# Altium PCB PCB_CL-PFC-01.PcbDoc
Units mil, origin at the board's own origin, x right, y up, seen from the top; angles counter-clockwise.
Board outline 3335 x 1570 mil, 2 copper layers (Top Layer, Bottom Layer); 26 components, 14 nets, 57 pads, 54 vias.
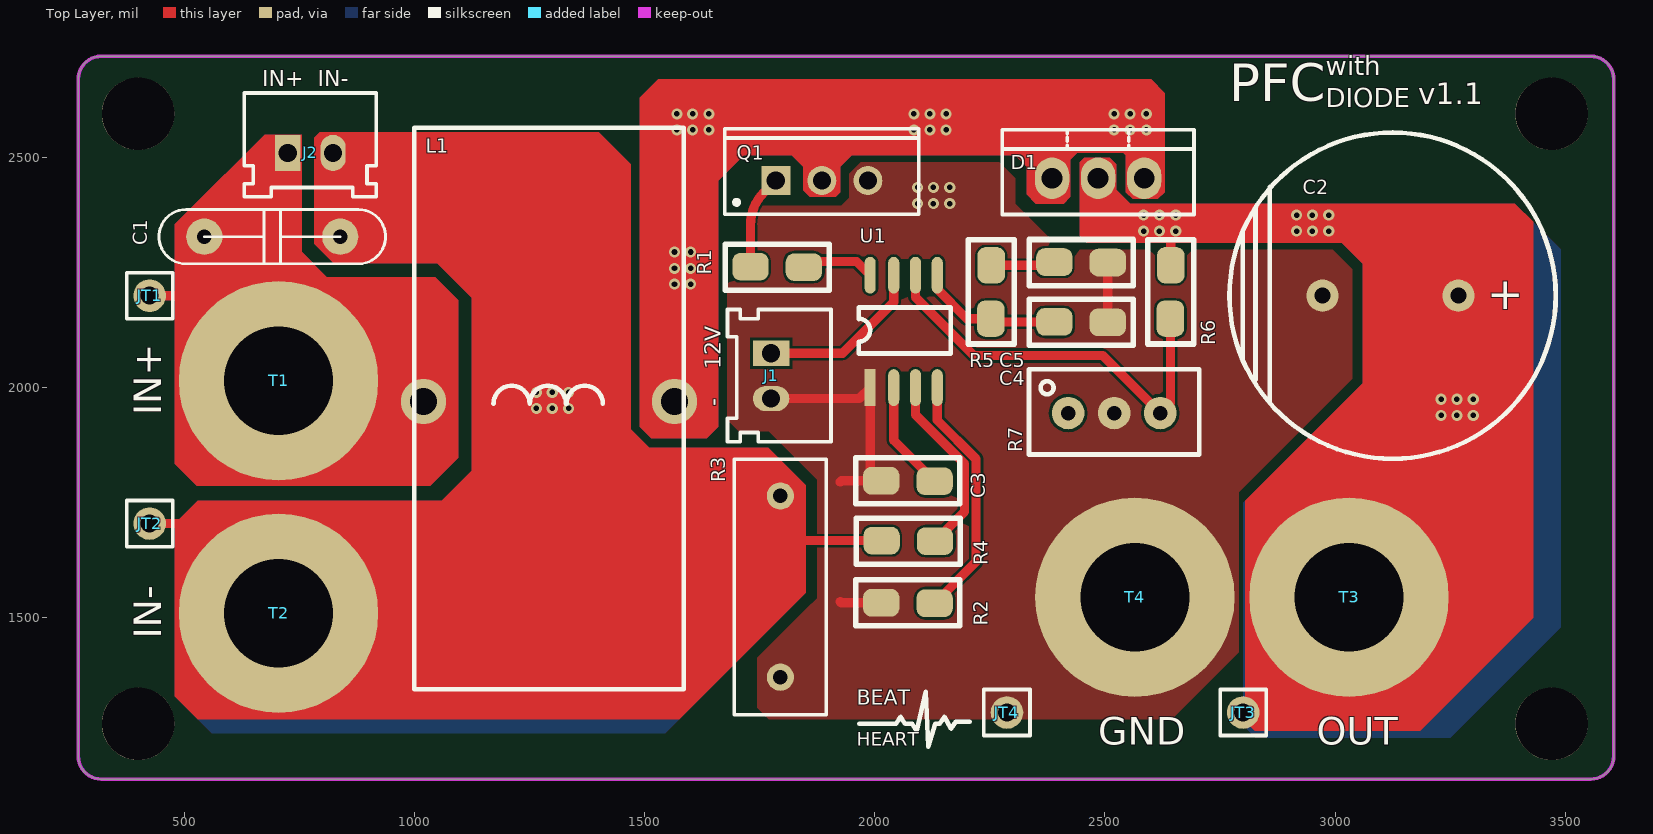
[diagram p0: Top Layer view]
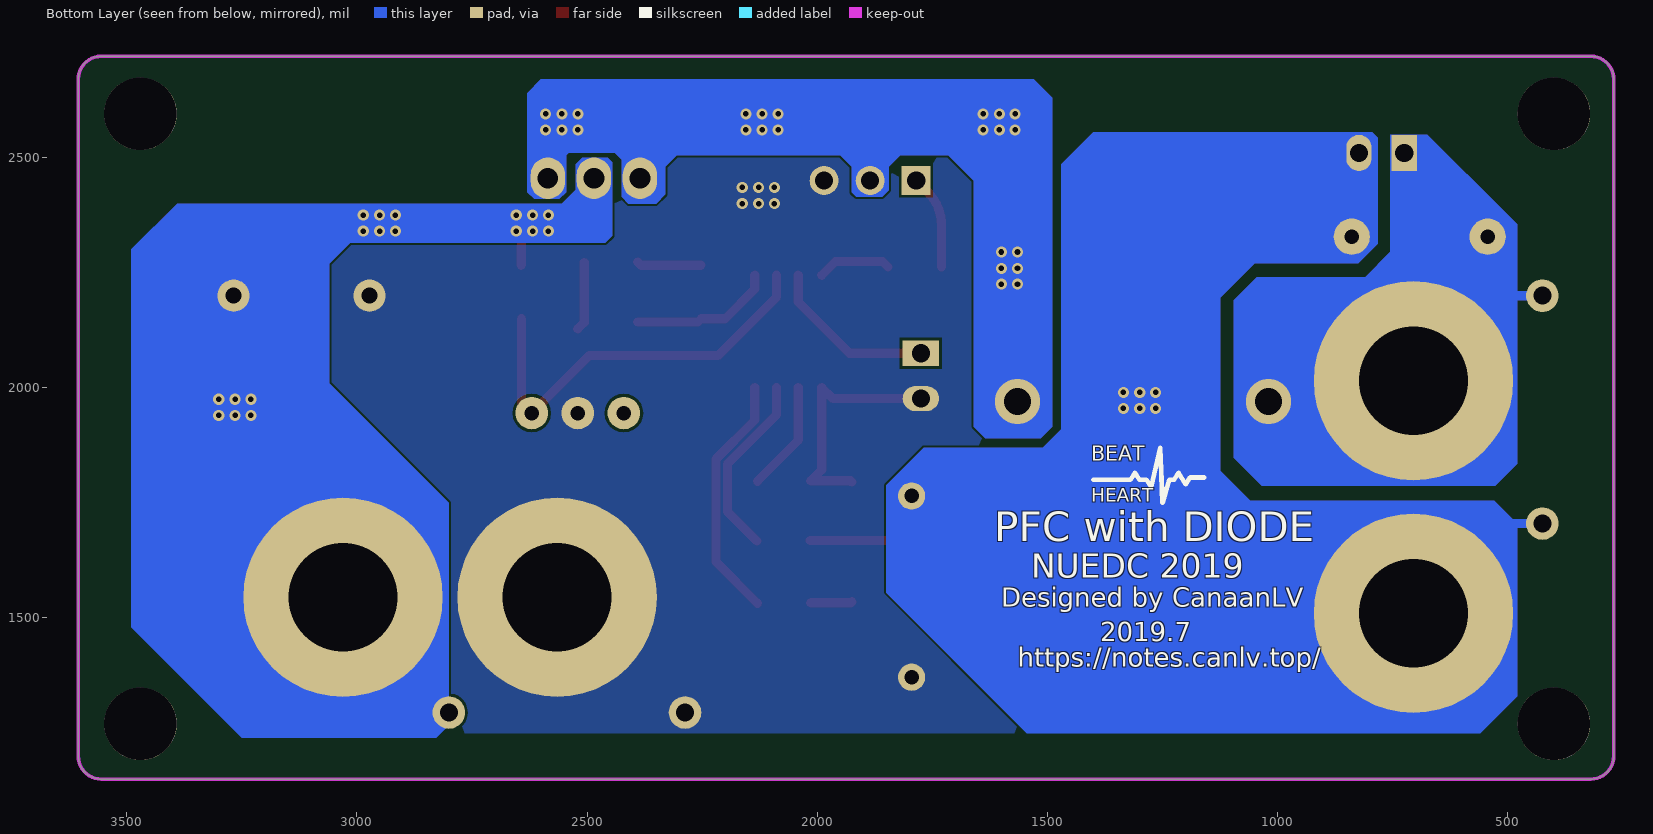
[diagram p1: Bottom Layer view, seen from below]
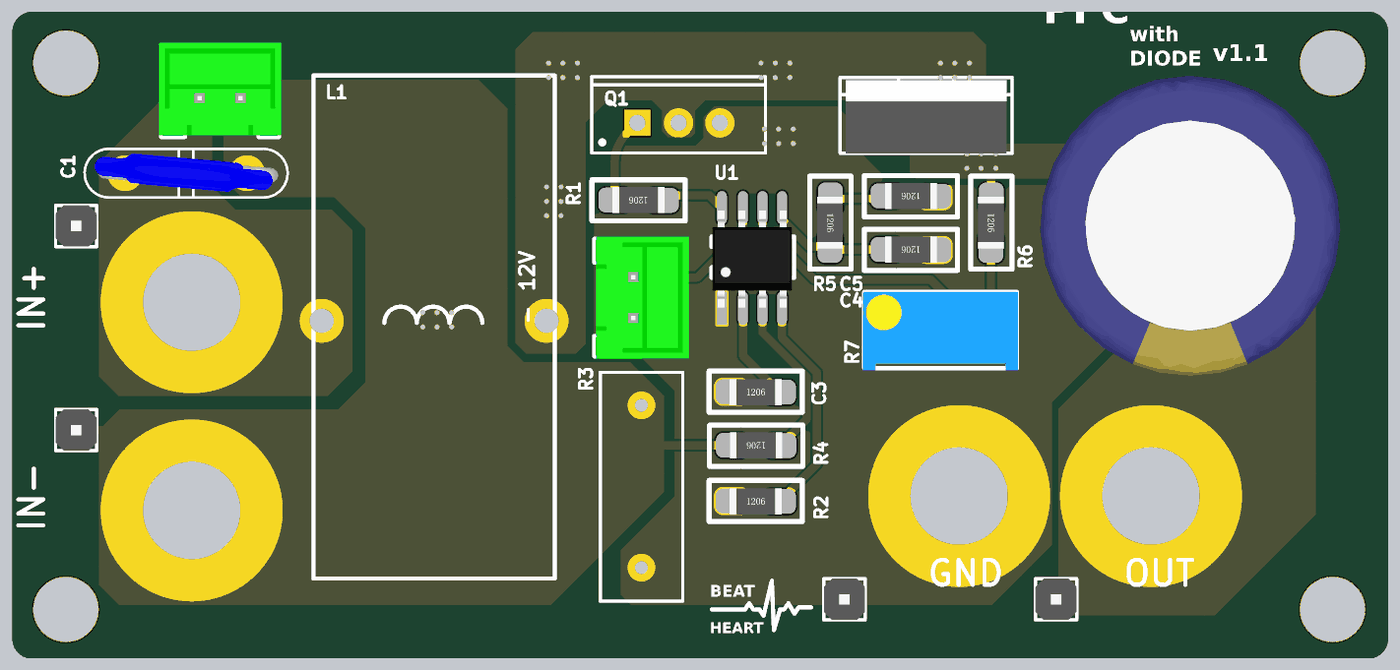
[diagram p2: 3D render of the assembled board from above, using the file's embedded part models]

## Layer stack, top to bottom
Top Solder: solder mask 0.4, Solder Resist, Dk 3.5
Top Layer: signal copper 1.4
Dielectric 1: dielectric 12.6, FR-4, Dk 4.8
Bottom Layer: signal copper 1.4
Bottom Solder: solder mask 0.4, Solder Resist, Dk 3.5

## Board outline
320,1150 cw(c320,1200) 270,1200 270,2670 cw(c320,2670) 320,2720 3555,2720 cw(c3555,2670) 3605,2670 3605,1200 cw(c3555,1200) 3555,1150

## Design rules (kind name [scope] priority, off if disabled: settings)
BoardOutlineClearance [All] p1: gap=7.87
Clearance [All] p1: gap=5 except(0: Arc-Text Track-Text Fill-Text Poly-Text Region-Text Text-Text; 3.5: SMDPad-Text THPad-Text Via-Text; 5.98: Arc-Via Track-Via THPad-Fill THPad-Poly THPad-Region Via-Fill Via-Poly Via-Region; 6: Arc-SMDPad Arc-THPad Track-SMDPad Track-THPad; 10: SMDPad-SMDPad SMDPad-THPad SMDPad-Via THPad-THPad THPad-Via Via-Via)
ComponentClearance [All] p1: gap=10 collisioncheckmode=3 verticalgap=10 showdistances=TRUE
DiffPairsRouting [All] p1: maxlimit=10 minlimit=6 mostfreqgap=10 toplayer_minwidth=5.98 toplayer_maxwidth=15 toplayer_prefwidth=15 bottomlayer_minwidth=5.98 bottomlayer_maxwidth=15 bottomlayer_prefwidth=15 maxuncoupledlength=500
Height [All] p1: minheight=0 maxheight=39370.08 prefheight=500
HoleSize [All] p1: absolutevalues=TRUE maxlimit=23.62 minlimit=11.81 maxpercent=80.000 minpercent=20.000
MinimumSolderMaskSliver [All] p1: minsoldermaskwidth=1.97
PlaneConnect [All] p1: planeconnectstyle=Direct reliefexpansion=20 reliefentries=4 reliefconductorwidth=10 reliefairgap=10
PolygonConnect [All] p1: connectstyle=Direct reliefconductorwidth=10 reliefentries=4 polygonreliefangle="90 Angle" airgapwidth=10
RoomDefinition Sheet_CL-PFC-01 [InComponentClass('Sheet1')] p1: confinementstyle=ConfineIn formatcopy=TRUE lockcomponents=FALSE outline 130,995 3650,995 3650,2770 130,2770
RoutingVias [All] p1: holewidth=15.75 width=27.56 viastyle="Through Hole" minholewidth=11.81 minwidth=23.62 maxholewidth=248.03 maxwidth=275.59
SilkToSilkClearance [All] p1: silktosilkclearance=5
SilkToSolderMaskClearance [IsPad] p1: minsilkscreentomaskgap=3.5 clearancetoexposedcopper=FALSE
SolderMaskExpansion [All] p1: expansion=4
Width [All] p1: maxlimit=80 minlimit=5 preferedwidth=10
22 further rules are at their usual default settings.

## Components (designator, comment, footprint, x,y, rotation, side; value= is the part's Value field where it differs from the comment)
C1 "uF" CAP-7.5-CP 465,2210 r0 top
C2 "uF" CZ18X35 3120,2200 r0 top
C3 "uF" C120603 2080,1795 r0 top
C4 "uF" C120603 2440,2145 r180 top
C5 "uF" C120603 2440,2275 r180 top
D1 "TO-220" TO-220 2485,2455 r0 top
J1 "SIP-2" 2.54XH接插件2P 1775,2075 r270 top
J2 "SIP-2" 2.54XH接插件2P 725,2510 r0 top
JT1 "SIP-1" 2.54排针1X1 425,2200 r0 top
JT2 "SIP-1" 2.54排针1X1 425,1705 r0 top
JT3 "SIP-1" 2.54排针1X1 2800,1294.58 r0 top
JT4 "SIP-1" 2.54排针1X1 2287.04,1294.58 r0 top
L1 "直插电感" 77930 1000,2565 r270 top
Q1 "IRF540N" TO-220AB 1885,2450 r0 top
R1 "R贴片电阻" R120603 1780,2265 r180 top
R2 "R贴片电阻" R120603 2080,1530 r0 top
R3 "R直插电阻" 水泥电阻 1795,1765 r270 top
R4 "R贴片电阻" R120603 2065,1670 r180 top
R5 "R贴片电阻" R120603 2250,2200 r270 top
R6 "R贴片电阻" R120603 2640,2200 r270 top
R7 "主控" ADJ-3296-1 2520,1945 r180 top
T1 "香蕉头接线柱" 香蕉接线柱Black_6mm 705,2015 r90 top
T2 "香蕉头接线柱" 香蕉接线柱Black_6mm 705,1510 r90 top
T3 "香蕉头接线柱" 香蕉接线柱Black_6mm 3030,1545 r180 top
T4 "香蕉头接线柱" 香蕉接线柱Black_6mm 2565,1545 r180 top
U1 "ICE1PC" SOP8 2065,2125 r90 top

## Footprints (in the part's own frame and the unit in brackets; to place one, negate y for a bottom-side part, rotate by r counter-clockwise, add the part's x,y. Pads: shape width x height; smd on the part's side, far side on the other; paste and mask are expansions set on the pad)
2.54XH接插件2P [mm]
  rect 1.4x2 hole 1: 1(0,0)
  oval 1.4x2 hole 1: 2(2.5,0)
  silkscreen extent -2.41,-2.41 4.88,3.3, body extent -2.51,-2.3 4.99,3.4, height 7
2.54排针1X1 [mm]
  round 1.8 hole 1: 1(0,0)
  silkscreen extent -1.27,-1.27 1.27,1.27, body extent -1.27,-1.27 1.27,1.27, height 2.5
77930 [mm]
  round 2.5 hole 1.5: 1(15.113,0.508) 2(15.113,14.351)
  silkscreen extent 0,0 30.99,14.86
ADJ-3296-1 [mm]
  round 1.8 hole 0.8: 1(-2.54,0) 2(0,0) 3(2.54,0)
  silkscreen extent -4.7,-2.41 4.7,2.29, body extent -4.76,-2.42 4.76,2.41, height 11.55
C120603 [mil] "兼容"
  rrect60% 78.74x60 smd: 1(-66,3) 2(50,2)
  silkscreen extent -121,-47 105,53, body extent -71,-29 55,33, height 24
CAP-7.5-CP [mm]
  round 2 hole 0.8: 1(2,3) 2(9.5,3)
  silkscreen extent -0.5,1.5 12,4.5, body extent 0.05,1.59 11.45,4.41, height 16.5
CZ18X35 [mil]
  round 70 hole 35: 1(147.64,0) 2(-147.64,0)
  silkscreen extent -350,-354 359,354, body extent -358,-360 368,365, height 1476
R120603 [mil] "兼容"
  rrect60% 78.74x60 smd: 1(-66,3) 2(50,2)
  silkscreen extent -121,-47 105,53, body extent -71,-29 55,33, height 24
SOP8 [mil]
  rect 80x24 smd: 1(-124.69,75)
  oval 80x24 smd: 2(-124.69,23.82) 3(-124.69,-23.43) 4(-124.69,-70.67) 5(119.41,-70.67) 6(119.41,-23.43) 7(119.41,23.82) 8(119.41,75)
  silkscreen extent -51,-100 49,100, body extent -123,-95 113,98, height 63
TO-220 [mil]
  oval 75x90 hole 45: A(-100,0) A(100,0) K(0,0)
  silkscreen extent -208,-79 208,105, body extent -195,-79 195,98, height 720
TO-220AB [mm] "TO, Thru-Hole, Vertical, Heatsink Mounted; 3 In-Line Leads; Pitch 2.54 mm"
  rect 1.6x1.6 hole 1: 1(-2.54,0)
  round 1.6 hole 1: 2(0,0) 3(2.54,0)
  silkscreen extent -5.35,-1.85 5.35,2.85, body extent -5.4,-1.9 5.4,2.9, height 19.3
水泥电阻 [mm]
  round 1.5 hole 0.8: 1(0,0) 2(10,0)
  silkscreen extent -2.03,-2.54 12.06,2.54
香蕉接线柱Black_6mm [mm]
  round 11 hole 6: 1(0,0)
  body extent -5.5,-5.5 5.5,13.5, height 9

## Part data
C1: library part C直插无极性
C2: library part C直插电容
C3 C4 C5: library part C贴片电容
Q1: "HEXFET Power MOSFET"
R7: library part R电位器
U1: library part IC8

## Free pads (board coordinates)
  round 157.48 hole 157.48: 2(400,2595) 3(400,1270) 4(3470,1270) 5(3470,2595)

## Via types
v1: diameter 24, hole 12, Top Layer to Bottom Layer, tented both sides, 54 vias

## Nets (pads, with @x,y where several pads share a name; then routed paths per layer and width w, separated by ;. In a path a pad name is that pad's centre, name@x,y a point inside that pad or via, vN(x,y) a via of type N, cw(c..) or ccw(c..) an arc to the next point about the centre after c; other vN are vias at no path point)
FGEQ: R2.2 U1.4 | length 540.5
  Top Layer w20: R2.2 2220,1622.01 2220,1845.36 2135.67,1929.69 U1.4
GATE: R1.1 U1.8 | length 161.6
  Top Layer w20: R1.1 1858.41,2274.41 1960,2274.41 U1.8
GND: C2.2 C3.1 C4.1 C5.1 J1.2 JT4.1 Q1.3 R2.1 R3.2 R7.2 T4.1 U1.1 | length 767
  Top Layer w20: J1.2 1966.26,1976.57 U1.1 1990,1822 C3.1 1928,1798 1925,1795 ; 1925,1535 1927,1533 R2.1 ; C5.1 C4.1 C4.1@2520,2128
  other v1: 2093.05,2400 2127.5,2400 2162.87,2400 2093.05,2435 2127.5,2435 2162.87,2435
ICOMP: C3.2 U1.2 | length 240.1
  Top Layer w20: U1.2 2041.18,1885.82 C3.2
IN+: C1.1 J2.1 JT1.1 L1.1 T1.1 | length 208.3
  Top Layer w20: JT1.1 500,2200 510,2190
  Bottom Layer w20: JT1.1 530,2200 540,2190
IN-: C1.2 J2.2 JT2.1 R3.1 R4.2 T2.1 | length 550.7
  Top Layer w20: JT2.1 535,1705 550,1690 ; R3.1 1795,1705 1832,1668 R4.2
  Bottom Layer w20: JT2.1 535,1705 545,1695
  other v1: 1265,1955 1299.45,1955 1334.82,1955 1265,1990 1299.45,1990 1334.82,1990
ISENSE: R4.1 U1.3 | length 404
  Top Layer w20: U1.3 2088.43,1941.57 2195,1835 2195,1731 R4.1
NetC5_2: C5.2 R5.1 | length 139.9
  Top Layer w20: R5.1 2383.01,2266 C5.2
NetD1_A: D1.A L1.2 Q1.2
  other v1: 1565,2225 1600,2225 1565,2259.45 1600,2259.45 1565,2294.82 1600,2294.82 1570,2560 1604.45,2560 1639.82,2560 2085,2560 2119.45,2560 2154.82,2560 2520,2560 2554.45,2560 2589.82,2560 1570,2595 1604.45,2595 1639.82,2595 2085,2595 2119.45,2595 2154.82,2595 2520,2595 2554.45,2595 2589.82,2595
PWM: Q1.1 R1.2 | length 205.5
  Top Layer w20: R1.2 1730,2353.58 cw(c1830,2353.58) 1759.29,2424.29 Q1.1
VCC_12V: J1.1 U1.7 | length 370.5
  Top Layer w20: J1.1 1930,2075 2041.18,2186.18 U1.7
VCOMP: C4.2 R5.2 U1.5 | length 314
  Top Layer w20: U1.5 2135.67,2214.33 2200,2150 R5.2 2259.01,2143 C4.2
VOUT: C2.1 D1.K JT3.1 R6.1 T3.1 | length 74.8
  Top Layer w20: R6.1 2643,2338 v1@2645,2340
  other v1: 3230,1940 3264.45,1940 3299.82,1940 3230,1975 3264.45,1975 3299.82,1975 2583.82,2340 2618.27,2340 2653.65,2340 2916.17,2340 2950.63,2340 2986,2340 2583.82,2375 2618.27,2375 2653.65,2375 2916.17,2375 2950.63,2375 2986,2375
VSENSE: R6.2 R7.1 U1.6 | length 897.7
  Top Layer w20: U1.6 2088.43,2196.57 2215,2070 2495,2070 R7.1 2642,1967 R6.2
pads on no net: R7.3

## Polygon pours and split planes (outlines as drawn)
GND on Top Layer "GND_L01_P000" (solid, remove dead copper, pour order 0): 1770,1280 2645,1280 2790,1425 2790,1772.8 3037.2,2020 3037.2,2257.8 2995,2300 2405,2300 2305,2400 2305,2455 2270,2490 1970,2490 1945,2465 1945,2413 1927,2395 1705,2395 1680,2370 1680,1930 1705,1905 1770,1905 1875,1800 1875,1543.3 1851.7,1520 1745,1413.3 1745,1305
GND on Bottom Layer "GND_L02_P002" (solid, remove dead copper, pour order 2): 620,2660 415,2455 415,2255 415,1410 575,1250 3287.64,1250 3490,1452.36 3490,1635 3490,2420 3250,2660

## Keep-outs
Keep-Out Layer:
  lines w7.87: 270,1200 ccw(c320,1200) 320,1150 3555,1150 ccw(c3555,1200) 3605,1200 3605,2670 ccw(c3555,2670) 3555,2720 700,2720 320,2720 ccw(c320,2670) 270,2670 270,1200

## Other copper
Top Layer:
  region net NetD1_A: 1490,1915 1515,1890 1635,1890 1660,1915 1660,2450 1715,2505 1820,2505 1845,2480 1845,2428.41 1858.41,2415 1915.71,2415 1925,2424.29 1925,2480 1950,2505 2305,2505 2330,2480 2330,2420 2350,2400 2410,2400 2425,2415 2425,2495 2440,2510 2540,2510 2545,2505 2545,2425 2560,2410 2615,2410 2630,2425 2630,2640 2600,2670 1530,2670 1490,2630
  region net IN-: 795,2555 782.5,2542.5 782.5,2312.5 825,2270 1050,2270 1125,2195 1125,1820 1060,1755 530,1755 480,1705 480,1330 530,1280 1575,1280 1850,1555 1850,1788.41 1768.41,1870 1510,1870 1470,1910 1470,2485 1400,2555
  region net IN+: 480,2210 480,2355 505,2380 675,2550 755,2550 755,2295 810,2240
  region net IN+: 1045,2240 1095,2190 1095,1848 1034.5,1787.5 527.5,1787.5 480,1835 480,2210 510,2240
  region net VOUT: 2445,2490 2445,2330 2460,2315 3014.41,2315 3060,2269.41 3060,2010 2805,1755 2805,1275 2825,1255 3185,1255 3430,1500 3430,2360 3390,2400 2635,2400 2555,2400 2525,2430 2525,2485 2510,2500 2455,2500
Bottom Layer:
  region net NetD1_A: 1490,1915 1515,1890 1635,1890 1660,1915 1660,2450 1715,2505 1820,2505 1845,2480 1845,2428.41 1858.41,2415 1915.71,2415 1925,2424.29 1925,2480 1950,2505 2305,2505 2330,2480 2330,2420 2350,2400 2410,2400 2425,2415 2425,2495 2440,2510 2540,2510 2545,2505 2545,2425 2560,2410 2615,2410 2630,2425 2630,2640 2600,2670 1530,2670 1490,2630
  region net IN-: 795,2555 782.5,2542.5 782.5,2312.5 825,2270 1050,2270 1125,2195 1125,1820 1060,1755 530,1755 480,1705 480,1330 560,1250 1545,1250 1850,1555 1850,1788.41 1768.41,1870 1510,1870 1470,1910 1470,2485 1400,2555
  region net IN+: 480,2210 480,2355 505,2380 675,2550 755,2550 755,2295 810,2240
  region net IN+: 1045,2240 1095,2190 1095,1848 1034.5,1787.5 527.5,1787.5 480,1835 480,2210 510,2240
  region net VOUT: 2445,2490 2445,2330 2460,2315 3014.41,2315 3060,2269.41 3060,2010 2800,1750 2800,1267.33 2827.33,1240 3250,1240 3489.59,1479.59 3489.59,2300.41 3390,2400 2635,2400 2555,2400 2525,2430 2525,2485 2510,2500 2455,2500

## Silkscreen, mask and mechanical layers (free items; w line width, h text height)
Top Overlay:
  lines w10: 1966,1270 2046,1270 2056,1285 2066,1270 2081,1270 2091,1255 2111,1340 2116,1220 2131,1270 2141,1270 2151,1285 2166,1260 2176,1275 2206,1275
  text "IN+" at 670,2655 h35
  text "IN-" at 790,2655 h35
  text "v1.1" at 3180,2600 h80
  text "PFC" at 2770,2595 h140
  text "with / DIODE" at 2980,2595 h70
  text "12V" at 1665,2040 h35 r90
  text "-" at 1665,1960 h35 r90
  text "IN+" at 450,1940 h60 r90
  text "IN-" at 450,1455 h60 r90
  text "BEAT" at 1961,1301 h55
  text "GND" at 2485,1225 h60
  text "OUT" at 2960,1225 h60
  text "HEART" at 1961,1213 h50
Bottom Overlay:
  lines w10: 1160,1805 1190,1805 1200,1790 1215,1815 1225,1800 1235,1800 1250,1750 1255,1870 1275,1785 1285,1800 1300,1800 1310,1815 1320,1800 1400,1800
  text "BEAT" at 1405,1831 h55
  text "HEART" at 1405,1743 h50
  text "PFC with DIODE" at 1615,1645 h110
  text "NUEDC 2019" at 1535,1570 h90
  text "Designed by CanaanLV" at 1600,1510 h70
  text "2019.7" at 1385,1435 h70
  text "https://notes.canlv.top/" at 1565,1380 h70

## Text inside footprints (layer, text, board x,y; h text height)
C2: Top Overlay "+" at 3330,2170 h68.9